# Altium PCB cycloonboard.PcbDoc
Units mil, origin at the board's own origin, x right, y up, seen from the top; angles counter-clockwise.
Board outline 5130 x 4150 mil, 2 copper layers (Top Layer, Bottom Layer); 36 components, 53 nets, 211 pads, 7 vias.
Unrouted connection lines stored in the file: 113.
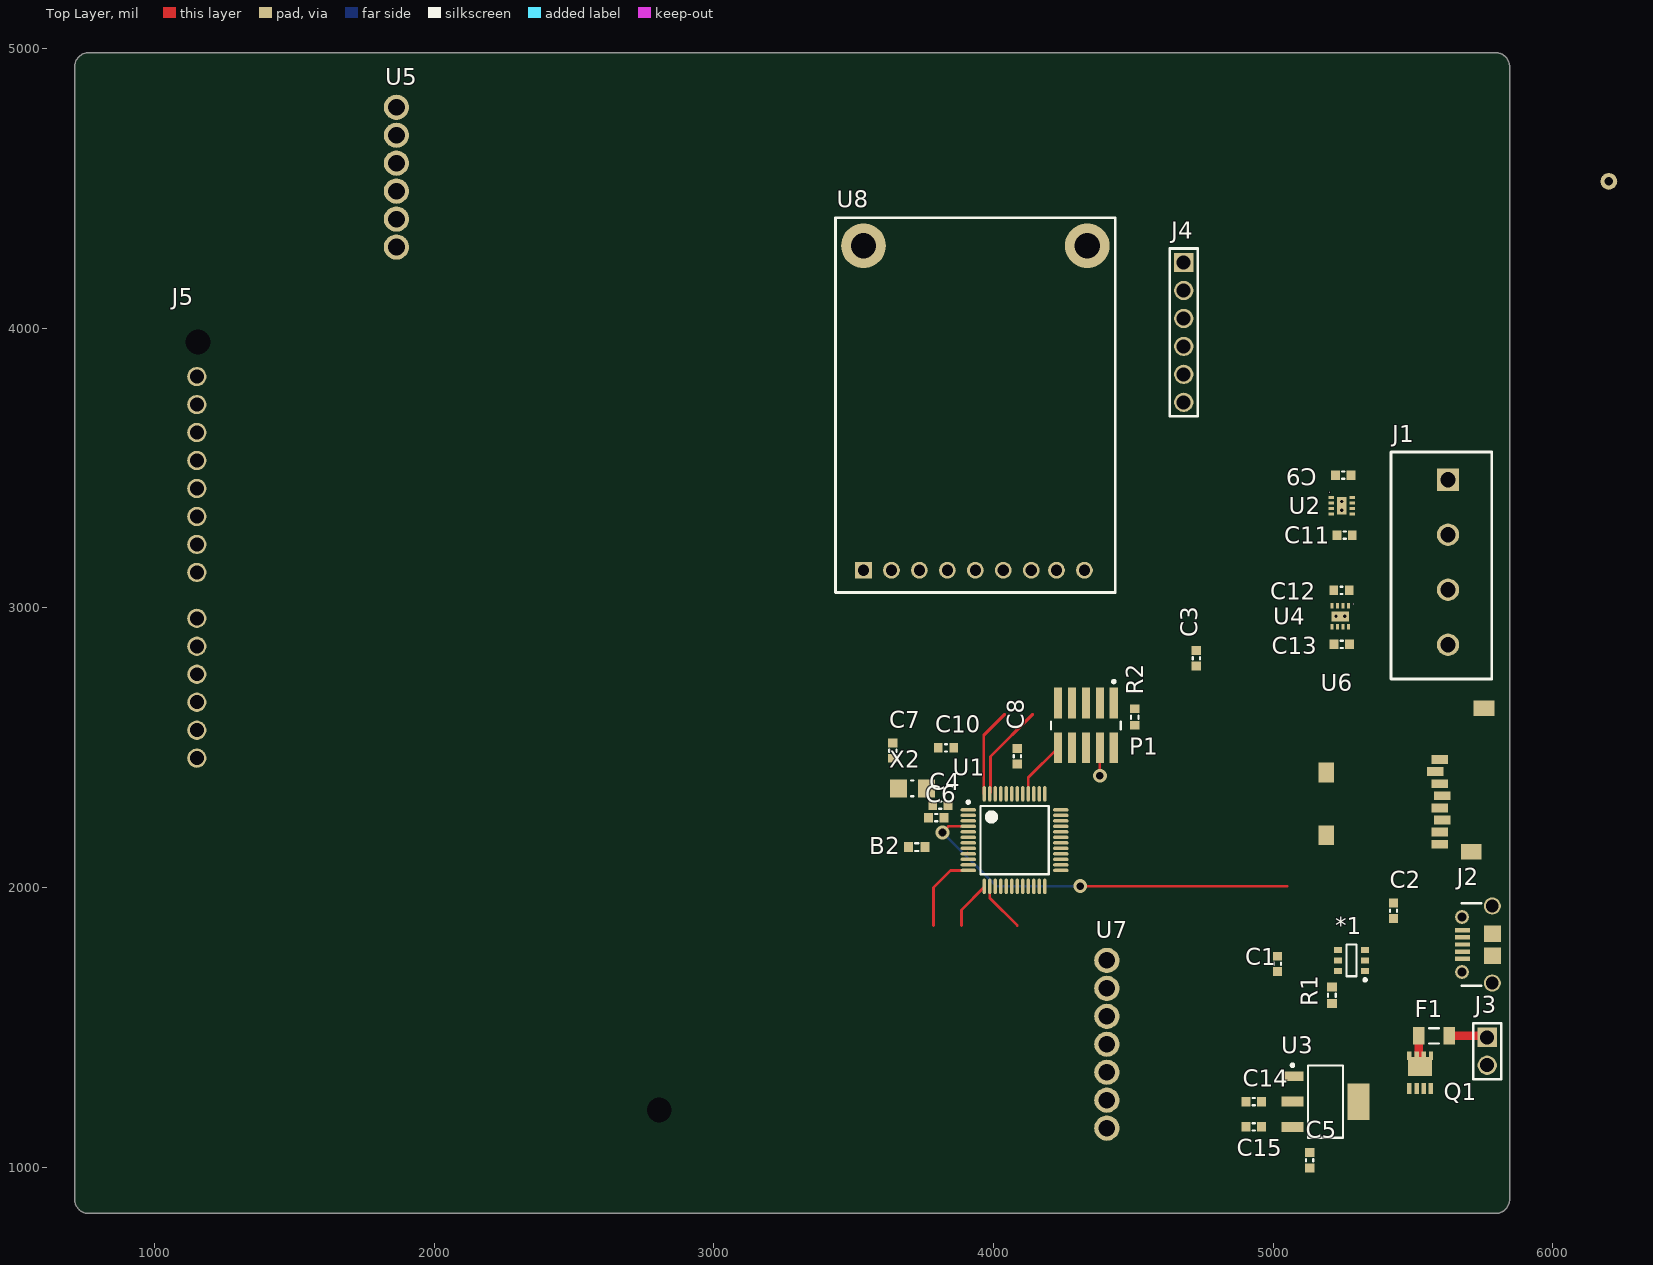
[diagram p0: Top Layer view]
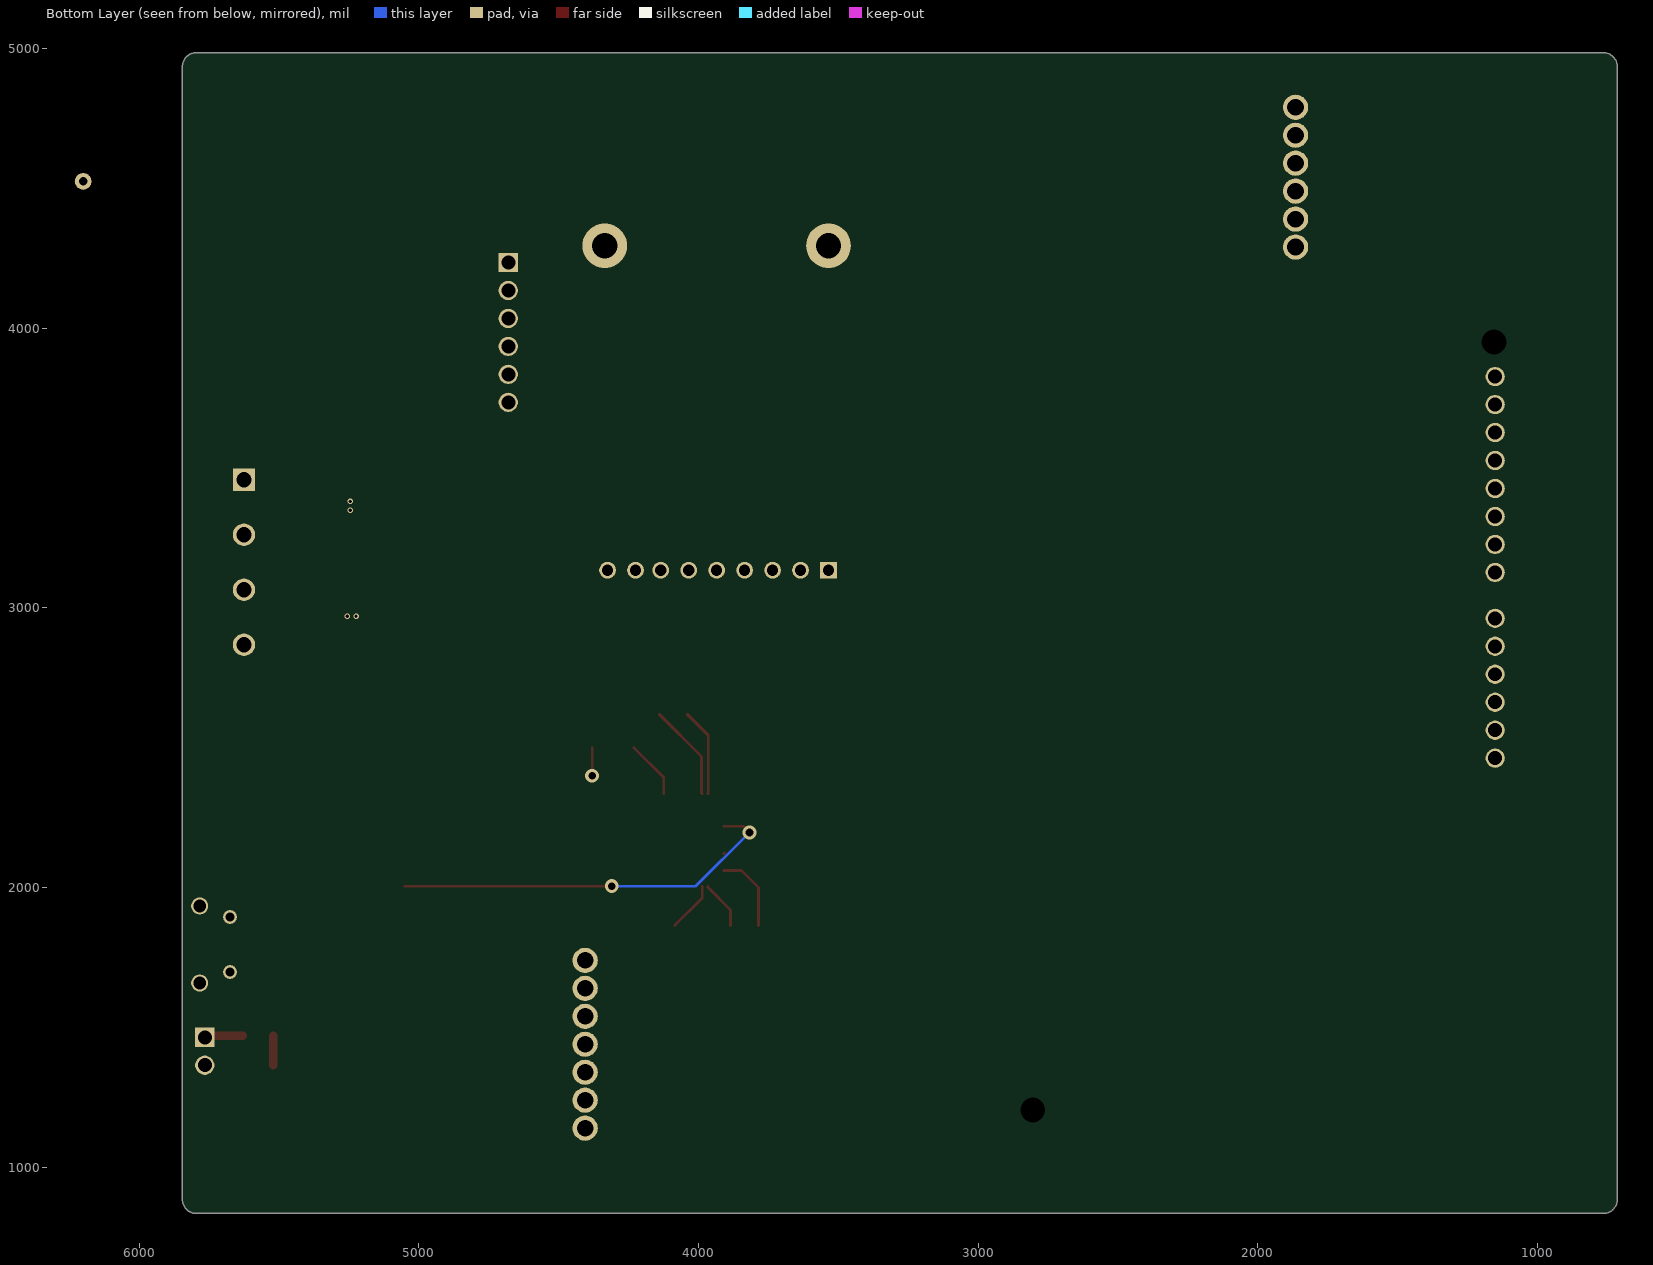
[diagram p1: Bottom Layer view, seen from below]

## Layer stack, top to bottom
Top Solder: solder mask 0.4, Solder Resist, Dk 3.5
Top Layer: signal copper 1.4
Dielectric 1: dielectric 12.6, FR-4, Dk 4.8
Bottom Layer: signal copper 1.4
Bottom Solder: solder mask 0.4, Solder Resist, Dk 3.5

## Board outline
715,885 715,4935 cw(c765,4935) 765,4985 5795,4985 cw(c5795,4935) 5845,4935 5845,885 cw(c5795,885) 5795,835 765,835 cw(c765,885)

## Design rules (kind name [scope] priority, off if disabled: settings)
Clearance [All] p1: gap=6 ignorepadtopadclearanceinfootprint=FALSE
DiffPairsRouting [All] p1: maxlimit=10 minlimit=10 mostfreqgap=10 toplayer_minwidth=15 toplayer_maxwidth=15 toplayer_prefwidth=15 bottomlayer_minwidth=15 bottomlayer_maxwidth=15 bottomlayer_prefwidth=15 maxuncoupledlength=500
PolygonConnect [All] p1: connectstyle=Relief reliefconductorwidth=10 reliefentries=4 polygonreliefangle="90 Angle" airgapwidth=10
RoutingVias [All] p1: holewidth=28 width=50 viastyle="Through Hole" minholewidth=28 minwidth=50 maxholewidth=28 maxwidth=50
SolderMaskExpansion [All] p1: expansion=4
Width [All] p1: maxlimit=30 minlimit=6 preferedwidth=10 minimp=50.000000 maximp=50.000000 favimp=50.000000
29 further rules are at their usual default settings.

## Classes and differential pairs
component class Topsheet: C9 C11 C12 C13 C14 C15 F1 J1 J3 J4 J5 Q1 U2 U3 U4 U5 U6 U7 U8
component class "Arduino Core": *1 B2 C1 C2 C3 C4 C5 C6 C7 C8 C10 J2 P1 R1 R2 U1 X2
differential pair USB: +USB_P -USB_N
differential pair USB_CON: +USB_CON_P -USB_CON_N

## Components (designator, comment, footprint, x,y, rotation, side; value= is the part's Value field where it differs from the comment)
*1 "USBLC6-2" 6SOT23 5280,1740 r180 top
B2 "FB_1608" R0603 3725,2145 r0 top
C1 "__template_cap" C0603 5015,1727.44 r90 top
C2 "__template_cap" C0603 5430,1917.44 r270 top
C3 "__template_cap" C0603 4725,2820 r270 top
C4 "__template_cap" C0603 3810,2295 r0 top
C5 "__template_cap" C0603 5130,1025 r90 top
C6 "__template_cap" C0603 3795,2250 r0 top
C7 "__template_cap" C0603 3640,2490 r270 top
C8 "__template_cap" C0603 4085,2470 r90 top
C9 "__template_cap" C0603 5250,3475 r180 top
C10 "__template_cap" C0603 3830,2500 r180 top
C11 "__template_cap" C0603 5255,3260 r180 top
C12 "__template_cap" C0603 5244.09,3062.6 r180 top
C13 "__template_cap" C0603 5245,2870 r180 top
C14 "__template_cap" C0603 4930,1235 r180 top
C15 "__template_cap" C0603 4930,1145 r180 top
F1 "__template_fuse" R1206 5575,1470 r180 top
J1 "CONN 1x4 Screw Terminal" CONN_1x4_5mm 5434.06,3557.13 r0 top
J2 "CONN_USB_MICROB_SMD_TH_R/A" CONN_USBMICROB_10118194-0001LF 5783.27,1796.57 r90 top
J3 "CONN HEADER 2POS VERT T/H" CONN_1x2_100MIL 5765,1465 r0 top
J4 "CONN HEADER 6POS T/H" CONN_1x6_100MIL 4680,4235 r0 top
J5 "ROCKBLOCK_V2" ROCKBLOCK_V2 1056.97,4047.52 r180 top
P1 "FTSH-105-01-F-DV-K" SMTC-FTSH-105-01-L-DV-K_V 4330,2580 r180 top
Q1 "Si7615" POWERPAK_1212-8_SINGLE 5525,1326.04 r90 top
R1 "__template_resistor" R0603 5210,1615.47 r90 top
R2 "__template_resistor" R0603 4505,2610 r90 top
U1 "SAMD21G18A-A" "SAMD21 TQFP-48" 4075,2170 r0 top
U2 "DRV8837CDSGT" 8WSON 5207.6,3355.16 r270 top
U3 "LDO_LD1117S33CTR" 4SOT223 5186.89,1235 r0 top
U4 "DRV8837CDSGT" 8WSON 5230.16,3007.4 r180 top
U5 "MAX31855" ADAFRUIT_THERMOCOUPLE_BREAKOUT 1865,4590 r0 top
U6 "uSD Card" MICROSD_CARD_SOCKET 5745.35,2106.34 r270 top
U7 "BMP280" ADAFRUIT_BMP280_BREAKOUT 4405,1440 r180 top
U8 "Adafruit GPS Module" adafruit_gps_746 3435,3055 r0 top
X2 "XTAL_9HT10-32.768KEZF-T" XTAL_TXC_9HT10 3710,2355 r0 top

## Footprints (in the part's own frame and the unit in brackets; to place one, negate y for a bottom-side part, rotate by r counter-clockwise, add the part's x,y. Pads: shape width x height; smd on the part's side, far side on the other; paste and mask are expansions set on the pad)
4SOT223 [mm] "SOT223, 4-Leads, Body 6.6x7.1mm (max), Pitch 2.30mm, IPC Medium Density"
  rect 2x0.9 smd: 1(-3,2.3) 2(-3,0) 3(-3,-2.3)
  rect 2x3.3 smd: 4(3,0)
  silkscreen extent -3.12,-3.27 1.6,3.42, body extent -3.34,-3.2 3.66,3.3, height 1.59
6SOT23 [mm] "SOT23, 6-Leads, Body 2.9x2.8mm (max), Pitch 0.95mm, IPC High Density"
  rect 0.75x0.55 smd: 1(-1.225,0.95) 2(-1.225,0) 3(-1.225,-0.95) 4(1.225,-0.95) 5(1.225,0) 6(1.225,0.95)
  silkscreen extent -1.35,-1.45 0.45,1.9, body extent -1.5,-1.5 1.5,1.5, height 1.46
8WSON [mm]
  rect 0.25x0.5 smd: 1(-1,0) 2(-0.5,0) 3(0,0) 4(0.5,0) 5(0.5,1.9) 6(0,1.9) 7(-0.5,1.9) 8(-1,1.9)
  rect 1.6x0.9 smd: PAD(-0.25,0.95)
ADAFRUIT_BMP280_BREAKOUT [mil]
  round 90 hole 60: 0(0,300) 1(0,200) 2(0,100) 3(0,0) 4(0,-100) 5(0,-200) 6(0,-300)
adafruit_gps_746 [mil]
  rect 60x60 hole 40: 1(100,80)
  round 160 hole 90: 1(100,1240)
  round 160 hole 90 paste+0: 1(900,1240)
  round 60 hole 40: 2(200,80) 3(300,80) 4(400,80) 5(500,80) 6(600,80) 7(700,80) 8(790,80)
  round 60 hole 40 paste+0: 9(890,80)
  silkscreen extent 0,0 1000,1340
ADAFRUIT_THERMOCOUPLE_BREAKOUT [mil]
  round 90 hole 60: 0(0,200) 1(0,100) 2(0,0) 3(0,-100) 4(0,-200) 5(0,-300)
C0603 [mm] "Chip Capacitor, 2-Leads, Body 1.6x0.8mm, IPC High Density"
  rect 0.8x0.85 smd: 1(-0.7,0) 2(0.7,0)
  silkscreen extent -0.1,-0.33 0.1,0.33, body extent -0.8,-0.4 0.8,0.4, height 0.8
CONN_1x2_100MIL [mm]
  rect 1.75x1.75 hole 1.27: 1(0,0)
  round 1.75 hole 1.27: 2(0,-2.54)
  silkscreen extent -1.27,-3.81 1.27,1.27, body extent -1.3,-3.86 1.24,1.22, height 8.5
CONN_1x4_5mm [mil]
  rect 80x80 hole 55: 1(190.94,-98.43)
  round 80 hole 55: 2(190.94,-295.28) 3(190.94,-492.13) 4(190.94,-688.98)
  silkscreen extent -13,-811 347,0, body extent -17,-811 337,-1, height 449
CONN_1x6_100MIL [mm]
  rect 1.75x1.75 hole 1.27: 1(0,0)
  round 1.75 hole 1.27: 2(0,-2.54) 3(0,-5.08) 4(0,-7.62) 5(0,-10.16) 6(0,-12.7)
  silkscreen extent -1.27,-13.97 1.27,1.27, body extent -1.27,-13.97 1.27,1.27, height 2.54
CONN_USBMICROB_10118194-0001LF [mm]
  rect 0.4x1.35 smd: 1(-1.3,2.7) 2(-0.65,2.7) 3(0,2.7) 4(0.65,2.7) 5(1.3,2.7)
  round 1.55 hole 1.15: SHIELD(-3.5,0) SHIELD(3.5,0)
  round 1.25 hole 0.85: SHIELD(-2.5,2.75) SHIELD(2.5,2.75)
  rect 1.5x1.55 smd: SHIELD(-1,0) SHIELD(1,0)
  silkscreen extent -3.75,1.02 3.75,2.75, body extent -4.02,-2.7 4.02,2.88, height 2.72
MICROSD_CARD_SOCKET [mm]
  rect 0.8x1.5 smd: 1(-8.94,-3.8) 2(-7.84,-4.2) 3(-6.74,-3.8) 4(-5.64,-3.6) 5(-4.54,-3.8) 6(-3.44,-3.6) 7(-2.34,-3.8) 8(-1.24,-3.8)
  rect 1.4x1.9 smd: CD(-13.6,0.2) SHIELD3(-0.55,-0.95)
  rect 1.8x1.4 smd: SHIELD1(-2.05,-14.1) SHIELD2(-7.75,-14.1)
  body extent -14,-14.43 0,0.83, height 1.85
POWERPAK_1212-8_SINGLE [mm] "PowerPAK 1212-8 Single (Vishay footprint)"
  rect 0.99x0.405 smd: 1(-1.12,-0.315) 1(-1.12,0.315) 1(-1.12,0.975) 4(-1.12,-0.975)
  rect 1.725x2.204 smd: 5(0.863,0)
  rect 0.76x0.405 smd: 5(1.855,-0.992) 5(1.855,-0.315) 5(1.855,0.315) 5(1.855,0.992)
  Mechanical 13 keep-out region: -0.168,-1.775 0.167,-1.775 0.167,1.775 -0.168,1.775
  body extent -1.5,-1.25 2,1.25, height 1.05
R0603 [mm] "Chip Resistor, 2-Leads, Body 1.6x0.8mm, IPC High Density"
  rect 0.8x0.9 smd: 1(-0.75,0) 2(0.75,0)
  silkscreen extent -0.15,-0.35 0.15,0.35, body extent -0.8,-0.4 0.8,0.4, height 0.45
R1206 [mm] "Chip Resistor, 2-Leads, Body 3.1x1.6mm, IPC High Density"
  rect 1.05x1.6 smd: 1(-1.375,0) 2(1.375,0)
  silkscreen extent -0.45,-0.7 0.45,0.7, body extent -1.6,-0.8 1.6,0.8, height 0.6
ROCKBLOCK_V2 [mm] "Header for RockBlock V2"
  round 1.75 hole 1.27: 1(-2.4,40.25) 2(-2.4,37.71) 3(-2.4,35.17) 4(-2.4,32.63) 5(-2.4,30.09) 6(-2.4,27.55) 7(-2.4,23.38) 8(-2.4,20.84) 9(-2.4,18.3) 10(-2.4,15.76) 11(-2.4,13.22) 12(-2.4,10.68) 13(-2.4,8.14) 14(-2.4,5.6)
  round 0 hole 2.261 unplated: HOLE(-44.4,72.2) HOLE(-2.5,2.45)
"SAMD21 TQFP-48" [mm] "TQFP-48, Body 7.00x7.00mm, Pitch 0.50mm, IPC Medium Density"
  oval 1.4x0.3 smd: 1(-4.2,2.75) 2(-4.2,2.25) 3(-4.2,1.75) 4(-4.2,1.25) 5(-4.2,0.75) 6(-4.2,0.25) 7(-4.2,-0.25) 8(-4.2,-0.75) 9(-4.2,-1.25) 10(-4.2,-1.75) 11(-4.2,-2.25) 12(-4.2,-2.75) 25(4.2,-2.75) 26(4.2,-2.25) 27(4.2,-1.75) 28(4.2,-1.25) 29(4.2,-0.75) 30(4.2,-0.25) 31(4.2,0.25) 32(4.2,0.75) 33(4.2,1.25) 34(4.2,1.75) 35(4.2,2.25) 36(4.2,2.75)
  oval 0.3x1.4 smd: 13(-2.75,-4.2) 14(-2.25,-4.2) 15(-1.75,-4.2) 16(-1.25,-4.2) 17(-0.75,-4.2) 18(-0.25,-4.2) 19(0.25,-4.2) 20(0.75,-4.2) 21(1.25,-4.2) 22(1.75,-4.2) 23(2.25,-4.2) 24(2.75,-4.2) 37(2.75,4.2) 38(2.25,4.2) 39(1.75,4.2) 40(1.25,4.2) 41(0.75,4.2) 42(0.25,4.2) 43(-0.25,4.2) 44(-0.75,4.2) 45(-1.25,4.2) 46(-1.75,4.2) 47(-2.25,4.2) 48(-2.75,4.2)
  silkscreen extent -4.32,-3.1 3.1,3.57, body extent -4.5,-4.5 4.5,4.5, height 1.2
SMTC-FTSH-105-01-L-DV-K_V [mm] "CONN, 10-Leads, Body 6.35x3.43mm, Pitch 1.27mm"
  rect 0.74x2.79 smd: 1(-2.54,-2.035) 2(-2.54,2.035) 3(-1.27,-2.035) 4(-1.27,2.035) 5(0,-2.035) 6(0,2.035) 7(1.27,-2.035) 8(1.27,2.035) 9(2.54,-2.035) 10(2.54,2.035)
  silkscreen extent -3.17,-4.1 3.17,0.34, body extent -3.17,-2.92 3.18,2.92, height 6.12
XTAL_TXC_9HT10 [mm] "Chip Capacitor, 2-Leads, Body 3.2x1.5mm, IPC Medium Density"
  rect 1.55x1.65 smd: 1(-1.275,0) 2(1.275,0)
  silkscreen extent -0.1,-0.72 0.1,0.72, body extent -1.65,-0.8 1.65,0.8, height 0.85

## Part data
*1: Capacitance @ Frequency=-, Current - Peak Pulse (10/1000µs)="5A (8/20µs)", Manufacturer=STMicroelectronics, Manufacturer Part Number=USBLC6-2SC6, Operating Temperature="-40°C ~ 125°C (TJ)", Package / Case=SOT-23-6, Power Line Protection=Yes, Supplier Part Number 1=497-5235-1-ND, Voltage - Breakdown (Min)=6V, Voltage - Clamping (Max) @ Ipp=17V, Voltage - Reverse Standoff (Typ)=5.25V, Applications=Ethernet, Bidirectional Channels=-, Category="Circuit Protection", ComponentLink1Description=http://www.st.com/web/en/resource/technical/document/datasheet/CD00050750.pdf, ComponentLink1URL=http://www.st.com/web/en/resource/technical/document/datasheet/CD00050750.pdf, Mounting Type="Surface Mount", Packaging="Cut Tape (CT)", Part Status=Active, Power - Peak Pulse=-, Pricing 1="1=0.51, 10=0.411, 100=0.2802, 500=0.21012, 1000=0.15759 (USD)", RoHS="RoHS Compliant", Stock 1=31719, Supplier 1=Digi-Key, Supplier Device Package=SOT-23-6, Type="Steering (Rail to Rail)", Unidirectional Channels=2
B2: "FERRITE BEAD 600 OHM 300mA", Current Rating (Max)=300mA, DC Resistance (DCR) (Max)="400 mOhm", Impedance @ Frequency="600 Ohm @ 100MHz", Manufacturer="Taiyo Yuden", Manufacturer Part Number=BK1608HW601-T, Operating Temperature="-55°C ~ 125°C", Package / Case="0603 (1608 Metric)", Ratings=-, Supplier Part Number 1=587-1879-1-ND, Category=Filters, ComponentLink1Description=http://ds.yuden.co.jp/TYCOMPAS/ut/detail.do?productNo=BK1608HW601-T&fileName=BK1608HW601-T_SS&mode=specSheetDownload, ComponentLink1URL=http://ds.yuden.co.jp/TYCOMPAS/ut/detail.do?productNo=BK1608HW601-T&fileName=BK1608HW601-T_SS&mode=specSheetDownload, Filter Type=-, Height (Max)="0.037\" (0.95mm)", Mounting Type="Surface Mount", Number of Lines=1, Packaging="Cut Tape (CT)", Part Status=Active, Pricing 1="1=0.1, 10=0.059, 50=0.0474, 100=0.0426, 250=0.0312, 500=0.0227, 1000=0.02223 (USD)", RoHS="RoHS Compliant", Size / Dimension="0.063\" L x 0.031\" W (1.60mm x 0.80mm)", Stock 1=11908, Supplier 1=Digi-Key
C1 C3 C5 C7 C10: library part 490-1519-1-ND, "CAP CER 0603 0.1µF X7R 50V 10%", Capacitance (shorthand)=0.1µF, Capacitance - pF (Machine readable)=#NAME?, Dielectric=X7R, Manufacturer="Murata Electronics North America", Rated Voltage=50V, Supplier 1=Digikey, Supplier Part Number 1=490-1519-1-ND, Type=capacitor
C2: library part 490-1506-1-ND, "CAP CER 0603 4700pF X7R 50V 10%", Capacitance (shorthand)=4700pF, Capacitance - pF (Machine readable)=#NAME?, Dielectric=X7R, Manufacturer="Murata Electronics North America", Rated Voltage=50V, Supplier 1=Digikey, Supplier Part Number 1=490-1506-1-ND, Type=capacitor
C4 C6: library part 490-1407-1-ND, "CAP CER 15PF 50V C0G/NP0 0603", Capacitance (shorthand)=15pF, Capacitance - pF (Machine readable)=15, Dielectric="C0G, NP0", Manufacturer="Murata Electronics North America", Rated Voltage=50V, Supplier 1=Digikey, Supplier Part Number 1=490-1407-1-ND, Type=capacitor
C8: library part 490-3900-1-ND, "CAP CER 0603 1µF X7R 16V 10%", Capacitance (shorthand)=1µF, Capacitance - pF (Machine readable)=#NAME?, Dielectric=X7R, Manufacturer="Murata Electronics North America", Rated Voltage=16V, Supplier 1=Digikey, Supplier Part Number 1=490-3900-1-ND, Type=capacitor
C9 C11 C12 C13 C14 C15: library part 490-13248-1-ND, "CAP CER 10UF 35V X5R 0603 20%", Capacitance (shorthand)=10µF, Capacitance - pF (Machine readable)=#NAME?, Dielectric=X5R, Manufacturer="Murata Electronics North America", Rated Voltage=35V, Supplier 1=Digikey, Supplier Part Number 1=490-13248-1-ND, Type=capacitor
J1: library part CONN_1x4_PhoenixContact_1935187, "CONN 1x4 Screw Terminal: Phoenix Contact 1935187", Supplier Part Number 1=277-1579-ND, ComponentLink1Description="Digikey part", ComponentLink1URL=https://www.digikey.com/product-detail/en/phoenix-contact/1935187/277-1579-ND/568616, Supplier 1=Digi-Key
J2: "CONN RCPT USB2.0 MICRO B SMD R/A", Colour=Black, Current Rating=1.8A, Flammability Rating="UL94 V-0", Insulation Resistance=1GR, Manufacturer="Amphenol FCI", Manufacturer Part Number=10118194-0001LF, Max Operating Temperature=85°C, Max Voltage Rating (AC)=100V, Min Operating Temperature=-55°C, Package Quantity=9600, Supplier Part Number 1=609-4618-1-ND, ComponentLink1Description=https://datasheet.ciiva.com/851/10118194-851110.pdf, ComponentLink1URL=https://datasheet.ciiva.com/851/10118194-851110.pdf, ComponentLink2Description=https://datasheet.ciiva.com/851/10118194-851111.pdf, ComponentLink2URL=https://datasheet.ciiva.com/851/10118194-851111.pdf, ComponentLink3Description=https://datasheet.ciiva.com/4598/10118194ac-197217-4598807.pdf, ComponentLink3URL=https://datasheet.ciiva.com/4598/10118194ac-197217-4598807.pdf, ComponentLink4Description=https://datasheet.ciiva.com/29907/10118194-29907230.pdf, ComponentLink4URL=https://datasheet.ciiva.com/29907/10118194-29907230.pdf, ComponentLink5Description=https://datasheet.ciiva.com/26945/getdatasheetpartid-418619-26945695.pdf, ComponentLink5URL=https://datasheet.ciiva.com/26945/getdatasheetpartid-418619-26945695.pdf, Connector Type=USB,Receptacle, Contact Material="Copper Alloy", Contact Plating=Nickel,Gold, Depth=5mm, Gender=Receptacle, Housing Material=Polymer, Lead Free="Lead Free", Length=8.05mm, Mount="Surface Mount,Horizontal", Number of Contacts=5, Number of Ports=1, Number of Terminals=5, Orientation="Right Angle", Packaging="Tape and Reel", Pitch=0.65mm, Pricing 1="1=0.46, 10=0.437, 25=0.3744, 50=0.318, 100=0.3056, 250=0.2744, 500=0.262 (USD)", Radiation Hardening=No, Stock 1=180464, Supplier 1=Digi-Key, Termination=Solder
J3: library part CONN_1x2, Color=Black, Manufacturer=FCI, Manufacturer Part Number=77311-118-02LF, Category="Connectors, Interconnects", ComponentLink1Description=http://portal.fciconnect.com/res/en/pdffiles/doc_search//77311.pdf, ComponentLink1URL=http://portal.fciconnect.com/res/en/pdffiles/doc_search//77311.pdf, Connector Type="Header, Unshrouded", Contact Finish="Gold, GXT™", Contact Finish Thickness="30µin (0.76µm)", Contact Mating Length="0.230\" (5.84mm)", Contact Type="Male Pin", Fastening Type=-, Features=-, Mounting Type="Through Hole", Number of Positions=2, Number of Positions Loaded=All, Number of Rows=1, Packaging=Bulk, Pitch="0.100\" (2.54mm)", RoHS="RoHS Compliant", Row Spacing=-, Termination=Solder
J4: library part CONN_1x6
J5: "CHILD OF SATAN, SOURCE OF BOTH TREMENDOUS FORTUNE AND UNSPEAKABLE ANGUISH", ComponentLink1Description="Developer's Guide", ComponentLink1URL=https://www.rock7.com/downloads/RockBLOCK-Developer-Guide-Mk2.pdf
P1: library part CMP-2000-05352-1, "Male Header, Pitch 1.27 mm, 2 x 5 Position, Height 6.12 mm, RoHS, Tube", Color=Black, Manufacturer=Samtec, Package Description="Male Header, Pitch 1.27 mm, 2 x 5 Position, Height 5.97 mm, Tail Length 4.32 mm", Package Reference=FTSH-105-01-L-DV-K, Category=Connectors,Interconnects, Connector Type=Header,Shrouded, Contact Finish=Gold, Contact Finish Thickness=3µin(0.08µm), Contact Mating Length="0.120\"(3.05mm)", Contact Type=MalePin, Datasheet URL=http://suddendocs.samtec.com/prints/ftsh-1xx-xx-xxx-dv-xxx-mkt.pdf, Datasheet Version="Rev. ET, 10/1995", Family=RectangularConnectors-Headers,MalePins, Fastening Type=-, Features=-, Manufacturer URL=http://www.samtec.com/, Mounting Type=SurfaceMount, Number of Positions=10, Number of Positions Loaded=All, Number of Rows=2, Package URL=http://suddendocs.samtec.com/prints/ftsh-1xx-xx-xxx-dv-xxx-footprint.pdf, Packaging=Tube, Pitch="0.050\"(1.27mm)", Row Spacing="0.050\"(1.27mm)", Series=FTSH, Termination=Solder
Q1: library part PFET_SI7615ADN-T1, "MOSFET P-CH 20V 35A PPK", Current - Continuous Drain (Id) @ 25°C="35A (Tc)", Drain to Source Voltage (Vdss)=20V, Input Capacitance (Ciss) @ Vds="5590pF @ 10V", Manufacturer="Vishay Siliconix", Manufacturer Part Number=SI7615ADN-T1-GE3, Operating Temperature="-55°C ~ 150°C (TJ)", Package / Case="PowerPAK® 1212-8", Power - Max=52W, Supplier Part Number 1=SI7615ADN-T1-GE3CT-ND, Category="Discrete Semiconductor Products", ComponentLink1Description=http://www.vishay.com/docs/62667/si7615adn.pdf, ComponentLink1URL=http://www.vishay.com/docs/62667/si7615adn.pdf, FET Feature=Standard, FET Type="MOSFET P-Channel, Metal Oxide", Gate Charge (Qg) @ Vgs="183nC @ 10V", Mounting Type="Surface Mount", Packaging="Cut Tape (CT)", Part Status=Active, Pricing 1="1=0.73, 10=0.646, 25=0.6068, 100=0.4951, 250=0.45988, 500=0.3914, 1000=0.31312 (USD)", Rds On (Max) @ Id, Vgs="4.4 mOhm @ 20A, 10V", RoHS="RoHS Compliant", Stock 1=98451, Supplier 1=Digi-Key, Supplier Device Package="PowerPAK® 1212-8", Vgs(th) (Max) @ Id="1.5V @ 250µA"
R1: library part 311-1.00MHRCT-ND, "RES SMD 1M OHM 1% 1/10W 0603", Manufacturer=Yageo, Manufacturer Part Number=RC0603FR-071ML, Operating Temperature="-55°C ~ 155°C", Power (Watts)="0.1W, 1/10W", Resistance="1 M?", Resistance (Sortable)=1000000, Temperature Coefficient=±100ppm/°C, Tolerance=±1%, Datasheets=http://www.yageo.com/documents/recent/PYu-RC_Group_51_RoHS_L_9.pdf, Image=//media.digikey.com/Renders/Yageo%20Renders/0603-(1608-Metric).jpg, Supplier 1=Digikey, Supplier Part Number 1=311-1.00MHRCT-ND
R2: library part 311-10.0KHRCT-ND, "RES SMD 10K OHM 1% 1/10W 0603", Manufacturer=Yageo, Manufacturer Part Number=RC0603FR-0710KL, Operating Temperature="-55°C ~ 155°C", Power (Watts)="0.1W, 1/10W", Resistance="10 k?", Resistance (Sortable)=10000, Temperature Coefficient=±100ppm/°C, Tolerance=±1%, Datasheets=http://www.yageo.com/documents/recent/PYu-RC_Group_51_RoHS_L_9.pdf, Image=//media.digikey.com/Renders/Yageo%20Renders/0603-(1608-Metric).jpg, Supplier 1=Digikey, Supplier Part Number 1=311-10.0KHRCT-ND
U1: "48Mhz Atmel SAM ARM Cortex M0+", Supplier Part Number 1=ATSAMD21G18A-AU-ND, ComponentLink1Description="Product Page", ComponentLink1URL=https://www.microchip.com/wwwproducts/en/ATSAMD21G18, ComponentLink2Description=Datasheet, ComponentLink2URL=http://ww1.microchip.com/downloads/en/DeviceDoc/SAM-D21-Family-Datasheet-DS40001882C.pdf, Supplier 1=Digi-Key
U2 U4: library part MOTOR_HBRIDGE_DRV8837C, "MOTOR DRIVER 1A", Current - Output / Channel=-, Current - Peak Output=1A, Manufacturer="Texas Instruments", Operating Temperature="-40°C ~ 150°C (TJ)", Package / Case="8-WFDFN Exposed Pad", Supplier Device Package="8-WSON (2x2)", Supplier Part Number 1=296-44747-1-ND, Voltage - Load="0 V ~ 11 V", Voltage - Supply="1.8 V ~ 7 V", Applications="DC Motors, Solenoids", Category="Integrated Circuits (ICs)", ComponentLink1Description=http://www.ti.com/lit/ds/symlink/drv8837c.pdf, ComponentLink1URL=http://www.ti.com/lit/ds/symlink/drv8837c.pdf, Fault Protection="Current Limiting, Over Temperature, Short Circuit, UVLO", Features=-, Interface=PWM, Load Type=Inductive, Manufacturer Part Number=DRV8837CDSGT, Mounting Type="Surface Mount", Output Configuration="Half Bridge (2)", Packaging="Cut Tape (CT)", Part Status=Active, Pricing 1="1=1.28, 10=1.146, 100=0.8931 (USD)", Rds On (Typ)="1 Ohm LS + HS", RoHS="RoHS Compliant", Stock 1=1424, Supplier 1=Digi-Key, Technology=NMOS
U3: "IC VOLTAGE REG 3.3V 800MA SOT223 INDUSTRIAL TEMP", Current - Limit (Min)=-, Current - Output=800mA, Manufacturer=STMicroelectronics, Manufacturer Part Number=LD1117S33CTR, Operating Temperature="-40°C ~ 125°C", Package / Case="TO-261-4, TO-261AA", Supplier Device Package=SOT-223, Supplier Part Number 1=497-1241-1-ND, Voltage - Dropout (Typical)="1.1V @ 800mA", Voltage - Input="Up to 15V", Voltage - Output=3.3V, Category="Integrated Circuits (ICs)", ComponentLink1Description=http://www.st.com/content/ccc/resource/technical/document/datasheet/99/3b/7d/91/91/51/4b/be/CD00000544.pdf/files/CD00000544.pdf/jcr:content/translations/en.CD00000544.pdf, ComponentLink1URL=http://www.st.com/content/ccc/resource/technical/document/datasheet/99/3b/7d/91/91/51/4b/be/CD00000544.pdf/files/CD00000544.pdf/jcr:content/translations/en.CD00000544.pdf, Mounting Type="Surface Mount", Number of Regulators=1, Packaging="Cut Tape (CT)", Part Status=Active, Pricing 1="1=0.46, 10=0.373, 100=0.2538, 500=0.19034, 1000=0.14276 (USD)", Regulator Topology="Positive Fixed", RoHS="RoHS Compliant", Stock 1=63873, Supplier 1=Digi-Key
U5: library part ADAFRUIT_THERMOCOUPLE_BREAKOUT
U6: library part MICRO_SD_CARD_HOLDER, "MICROSD CARD HOLDER, PUSH-PUSH", Manufacturer=3M, Manufacturer Part Number=2908-05WB-MG, Supplier Part Number 1=3M5607CT-ND, Card Type="Secure Digital - microSD™", Category="Connectors, Interconnects", ComponentLink1Description=http://multimedia.3m.com/mws/media/416257O/3mtm-card-connector-microsdtm-2900-series-ts2197.pdf, ComponentLink1URL=http://multimedia.3m.com/mws/media/416257O/3mtm-card-connector-microsdtm-2900-series-ts2197.pdf, Connector Type="Connector and Ejector", Contact Finish=Gold, Contact Finish Thickness="15µin (0.38µm)", Ejector Side=-, Features=Switch, Height Above Board="0.073\" (1.85mm)", Insertion, Removal Method="Push In, Push Out", Mounting Feature="Normal, Standard - Top", Mounting Type="Surface Mount, Right Angle", Number of Positions="10 (8 + 2)", Packaging="Cut Tape (CT)", Pricing 1="1=3.6, 10=3.458, 25=3.1704, 50=3.0262, 100=2.882, 250=2.52176, 500=2.4497, 1000=2.08945 (USD)", RoHS="RoHS Compliant", Stock 1=32313, Supplier 1=Digi-Key
U7: library part ADAFRUIT_BMP280_BREAKOUT
U8: library part ADAFRUIT_GPS_746, "https://www.adafruit.com/product/746", ComponentLink1Description="Adafruit GPS Module", ComponentLink1URL=https://www.adafruit.com/product/746
X2: "CRYSTAL 32.768 KHZ 12.5 PF SMD", ESR (Equivalent Series Resistance)="70 kOhm", Frequency=32.768kHz, Frequency Stability=-, Frequency Tolerance=±10ppm, Load Capacitance=12.5pF, Manufacturer="TXC CORPORATION", Manufacturer Part Number=9HT10-32.768KEZF-T, Operating Mode=Fundamental, Operating Temperature="-40°C ~ 85°C", Package / Case=2-SMD, Supplier Part Number 1=887-1507-1-ND, Category="Crystals and Oscillators", ComponentLink1Description=Datasheet, ComponentLink1URL=http://www.txccrystal.com/images/pdf/9ht10.pdf, Height="0.033\" (0.85mm)", Mounting Type="Surface Mount", Packaging="Cut Tape (CT)", Pricing 1="1=1.88, 10=1.625, 50=1.425, 100=1.125, 500=0.95, 1000=0.75 (USD)", Ratings=-, RoHS="RoHS Compliant", Size / Dimension="0.126\" L x 0.059\" W (3.20mm x 1.50mm)", Stock 1=5250, Supplier 1=Digi-Key, Type="kHz Crystal (Tuning Fork)"

## Free pads (board coordinates)
  round 60 hole 30: 3(6200,4525)

## Via types
v1: diameter 19.68, hole 11.81, Top Layer to Bottom Layer, 4 vias
v2: diameter 50, hole 28, Top Layer to Bottom Layer, 3 vias

## Nets (pads, with @x,y where several pads share a name; then routed paths per layer and width w, separated by ;. In a path a pad name is that pad's centre, name@x,y a point inside that pad or via, vN(x,y) a via of type N, cw(c..) or ccw(c..) an arc to the next point about the centre after c; other vN are vias at no path point)
AGND: C1.2 C2.1 C3.1 C4.1 C5.1 C6.1 C7.1 C8.2 C9.2 C10.2 C11.2 C12.2 C13.2 C14.2 C15.2 J2.5 J3.2 J4.3 J5.6 P1.3 P1.5 P1.9 Q1.4 R1.2 U1.5 U1.18 U1.35 U1.42 U2.4 U2.PAD U3.1 U4.4 U4.PAD U5.2 U6.6 U7.2 U8.7
  other v1: 5224.25,2970 5255.75,2970 5245,3349.25 5245,3380.75
AVDD: B2.2 C7.2 U1.6
BMP_CS: U1.12 U7.6 | length 285.2
  Top Layer w10: 3785,1865 3785,2000 3846.73,2061.73 U1.12
MISO_SD: U1.27 U6.7
MOSI_SD: U1.25 U6.3
MOTOR1_1: J1.1 U2.2
MOTOR1_2: J1.2 U2.3
MOTOR2_1: J1.3 U4.2
MOTOR2_2: J1.4 U4.3
MOTOR_IN_1_1: U1.32 U2.6
MOTOR_IN_1_2: U1.31 U2.5
MOTOR_IN_2_1: U1.30 U4.6
MOTOR_IN_2_2: U1.29 U4.5
Net*1_2: *1.2 C2.2 J2.SHIELD R1.1
NetC4_2: C4.2 U1.1 X2.2
NetC6_2: C6.2 U1.2 X2.1
NetF1_2: F1.2 Q1.5 | length 111.7
  Top Layer w10: Q1.5@5520.87,1364.13 Q1.5@5525,1360
  Top Layer w30: Q1.5@5520.87,1364.13 F1.2
NetU1_11: U1.11
NetU1_15: U1.15
NetU1_16: U1.16
NetU1_19: U1.19
NetU1_20: U1.20
NetU1_21: U1.21
NetU1_22: U1.22
NetU1_24: U1.24
NetU1_28: U1.28
NetU1_37: U1.37
NetU1_38: U1.38
NetU1_39: U1.39
NetU1_41: U1.41
RST: P1.10 R2.1 U1.40 | length 208.3
  Top Layer w10: U1.40 4124.21,2394.09 P1.10
RX: U1.48 U8.6 | length 316.4
  Top Layer w10: U1.48 3965,2337.09 3965,2545 4040,2620
RXB: J5.2 U1.10
SCK: J4.5 U1.14 U7.3 | length 180.5
  Top Layer w10: U1.14 3986.42,1963.58 4085,1865
SCK_SD: U1.26 U6.5
SD_CS: U1.4 U6.2 | length 1413.4
  Top Layer w10: v2(3817.5,2197.5) 3839.21,2219.21 U1.4 ; v2(4310,2005) 5050,2005
  Bottom Layer w10: v2(3817.5,2197.5) 4010,2005 v2(4310,2005)
SDI: J4.4 U1.13 U7.5 | length 173.5
  Top Layer w10: 3885,1865 3885,1920 3966.73,2001.73 U1.13
SWCLK: P1.4 U1.45 | length 84.9
  Top Layer w10: v2@4380,2415 P1.4
  other v2: 4380,2400
SWDIO: P1.2 U1.46
THERMO_CS: U1.3 U5.4
TMISO: U1.23 U5.3
TMOSI: U1.7
TSCK: U1.8 U5.5
TX: U1.47 U8.5 | length 348.3
  Top Layer w10: U1.47 3989.2,2338.13 3989.2,2469.2 4140,2620
TXB: J5.3 U1.9 | length 3.9
  Top Layer w10: U1.9@3906.87,2123.57 U1.9
USB_CON_N: *1.1 J2.2
USB_CON_P: *1.3 J2.3
USB_N: *1.6 U1.33
USB_P: *1.4 U1.34
VBUS: *1.5 C1.1 C9.1 C12.1 C15.1 J2.1 J4.1 J5.8 Q1.1 U2.1 U3.3 U4.1 U5.0 U6.4 U7.0 U8.8
VCC: B2.1 C3.2 C5.2 C10.1 C11.1 C13.1 C14.1 P1.1 R2.2 U1.17 U1.36 U1.44 U2.8 U3.2 U4.8
VCELL: F1.1 J3.1 | length 137.9
  Top Layer w10: J3.1@5760,1470 J3.1
  Top Layer w30: F1.1 J3.1@5760,1470
VDDCORE: C8.1 U1.43
pads on no net: J2.4 J4.2 J4.6 J5.1 J5.4 J5.5 J5.7 J5.9 J5.10 J5.11 J5.12 J5.13 J5.14 J5.HOLE P1.6 P1.7 P1.8 U2.7 U3.4 U4.7 U5.1 U6.1 U6.8 U6.CD U6.SHIELD1 U6.SHIELD2 U6.SHIELD3 U7.1 U7.4 U8.1 U8.2 U8.3 U8.4 U8.9

## Silkscreen, mask and mechanical layers (free items; w line width, h text height)
Board Outline:
  lines w10: 715,885 ccw(c765,885) 765,835 5795,835 ccw(c5795,885) 5845,885 5845,4935 ccw(c5795,4935) 5795,4985 1000,4985 765,4985 ccw(c765,4935) 715,4935 715,885

## Text inside footprints (layer, text, board x,y; h text height)
J2: Mechanical 1 "Board Edge" at 5891.54,1698.15 h39.37 r90